# Altium PCB 7segments.PcbDoc
Units mm, origin at the board's own origin, x right, y up, seen from the top; angles counter-clockwise.
Board outline 40 x 42 mm, 2 copper layers (Top Layer, Bottom Layer); 10 components, 21 nets, 50 pads, 4 vias.
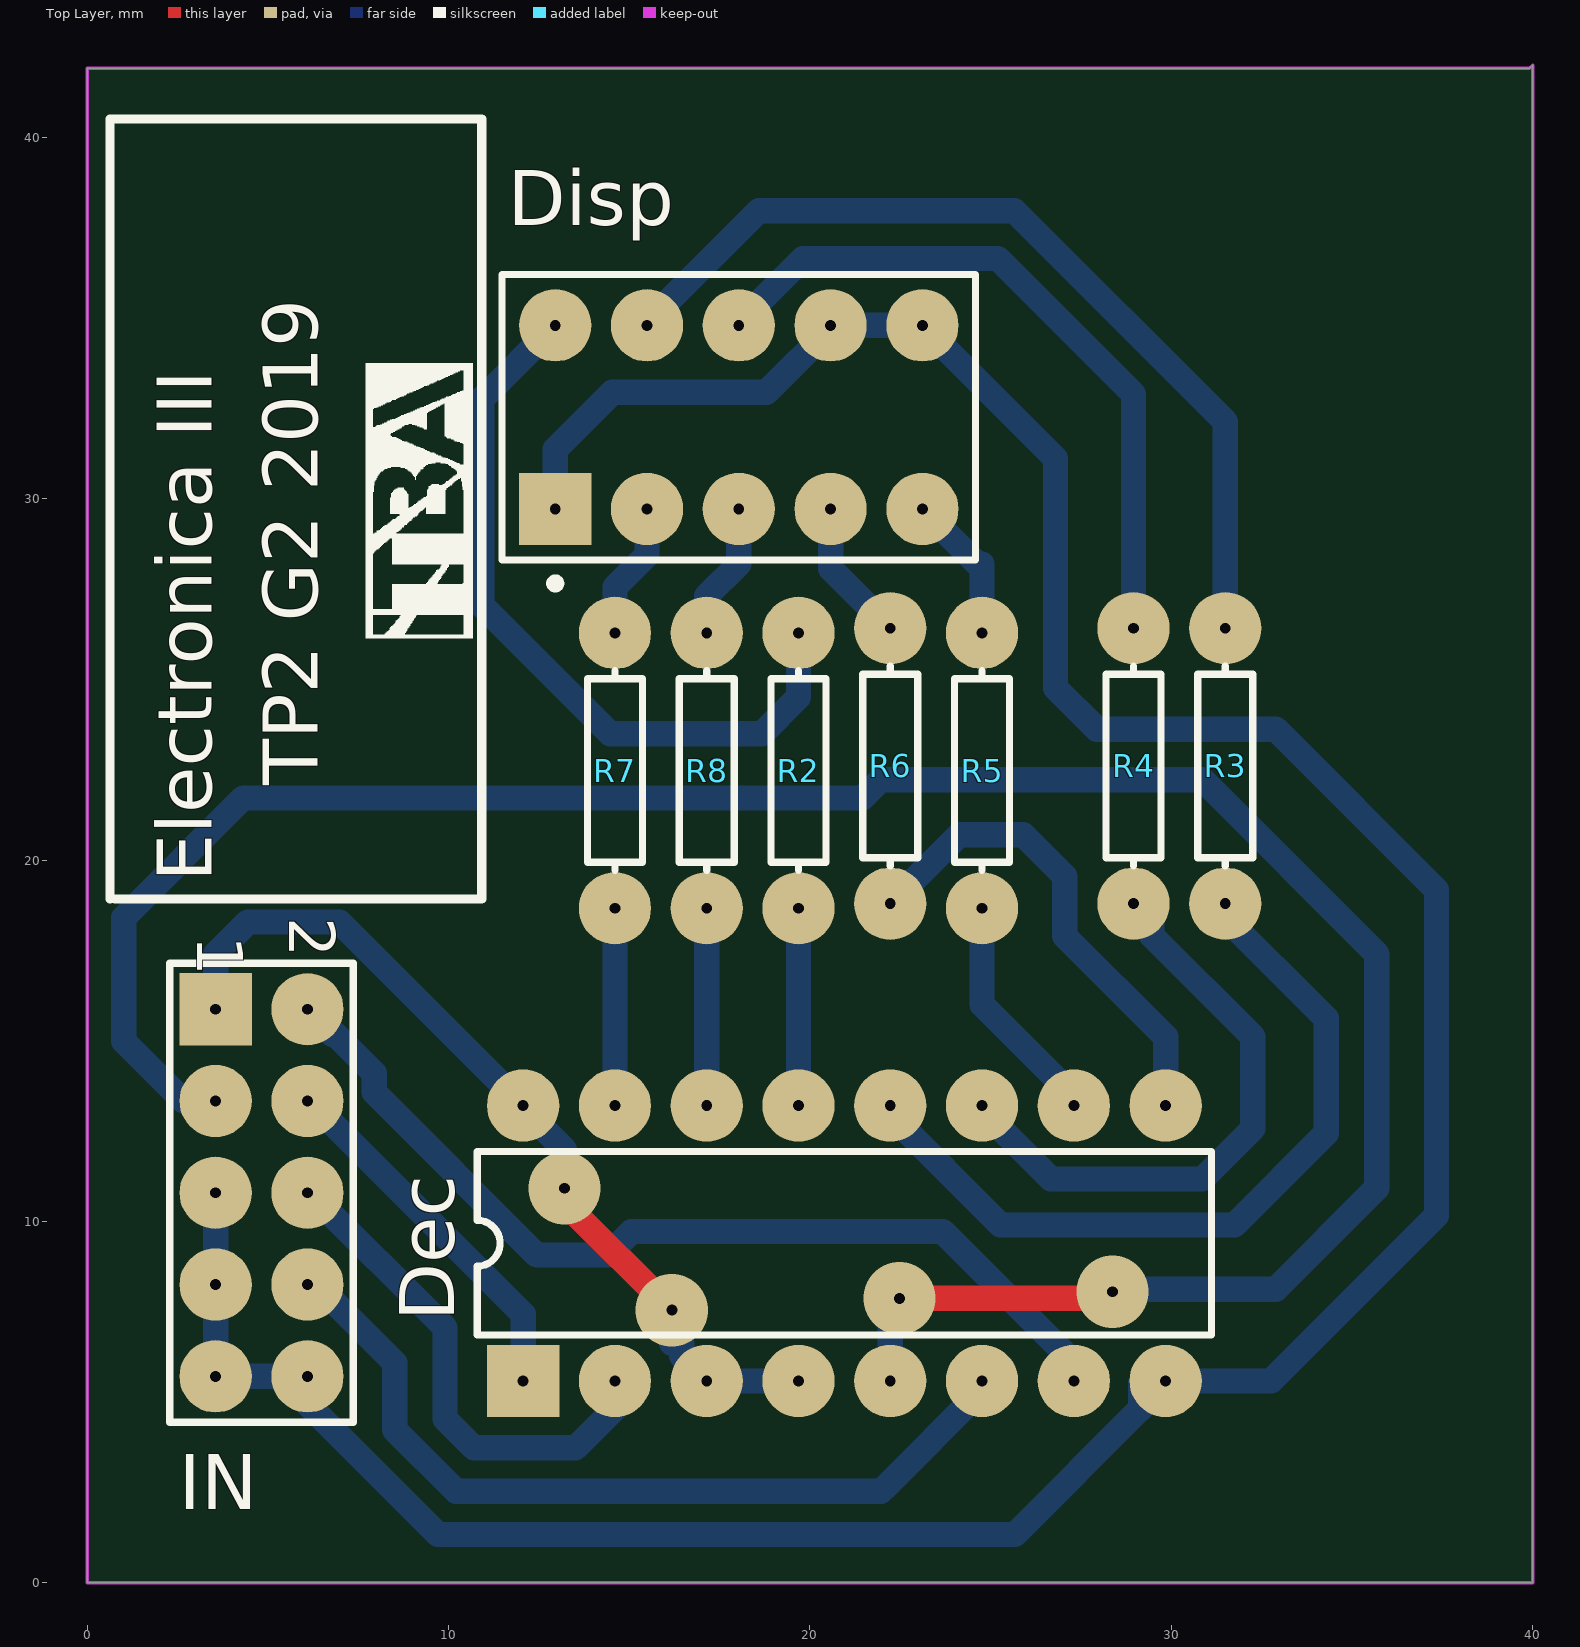
[diagram p0: Top Layer view]
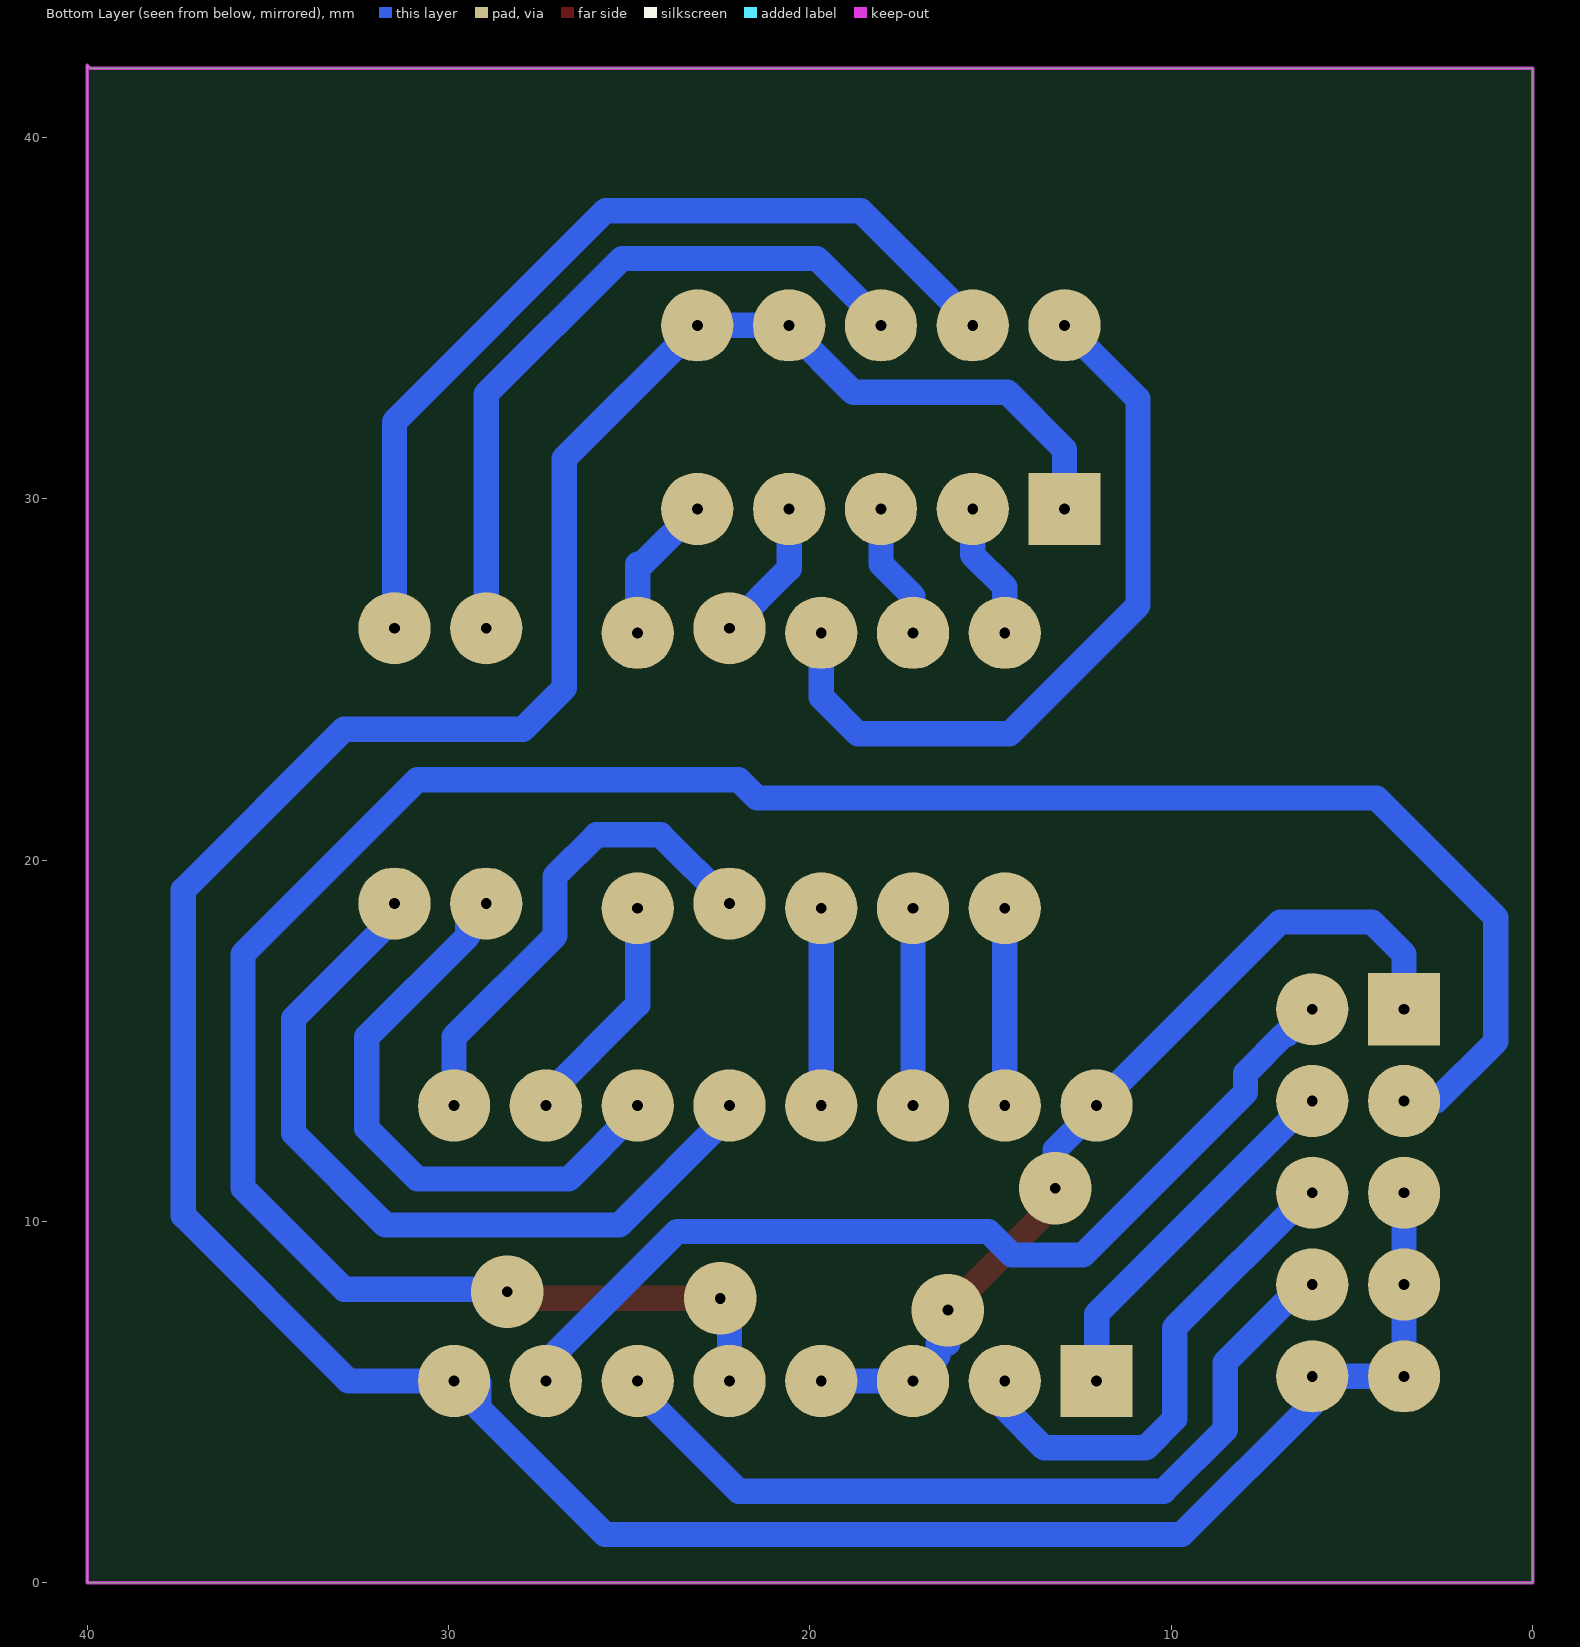
[diagram p1: Bottom Layer view, seen from below]

## Layer stack, top to bottom
Top Solder: solder mask 0.0102, Solder Resist, Dk 3.5
Top Layer: signal copper 0.0356
Dielectric 1: dielectric 0.32, FR-4, Dk 4.8
Bottom Layer: signal copper 0.0356
Bottom Solder: solder mask 0.0102, Solder Resist, Dk 3.5

## Board outline
0,0 0,41.91 39.91,41.91 40,42 40,0

## Design rules (kind name [scope] priority, off if disabled: settings)
Clearance [All] p1: gap=0.5
PolygonConnect [All] p1: connectstyle=Relief reliefconductorwidth=0.254 reliefentries=4 polygonreliefangle="90 Angle" airgapwidth=0.254
RoutingVias [All] p1: holewidth=0.3 width=2 viastyle="Through Hole" minholewidth=0.3 minwidth=2 maxholewidth=0.3 maxwidth=2
SolderMaskExpansion [All] p1: expansion=0.102
Width [All] p1: maxlimit=0.7 minlimit=0.7 preferedwidth=0.7
30 further rules are at their usual default settings.

## Components (designator, comment, footprint, x,y, rotation, side; value= is the part's Value field where it differs from the comment)
Dec "CD4511" DIP16 12.065,5.588 r90 top
Disp "Dpy Red-CC" A 18.034,32.258 r90 top
IN "Header 5X2" HDR2X5 3.556,15.875 r270 top
R2 "270" AXIAL-0.3 19.685,22.479 r90 top
R3 "270" AXIAL-0.3 31.496,22.606 r90 top
R4 "270" AXIAL-0.3 28.956,22.606 r90 top
R5 "270" AXIAL-0.3 24.765,22.479 r90 top
R6 "270" AXIAL-0.3 22.225,22.606 r90 top
R7 "270" AXIAL-0.3 14.605,22.479 r90 top
R8 "270" AXIAL-0.3 17.145,22.479 r90 top

## Footprints (in the part's own frame and the unit in brackets; to place one, negate y for a bottom-side part, rotate by r counter-clockwise, add the part's x,y. Pads: shape width x height; smd on the part's side, far side on the other; paste and mask are expansions set on the pad)
A [mm] "LED, 7-Segment Display, 7.62 mm, RHD; 10 Leads; Row Space 5.08 mm; Pitch 2.54 mm"
  rect 2x2 hole 0.3: 1(-2.54,5.08)
  round 2 hole 0.3: 2(-2.54,2.54) 3(-2.54,0) 4(-2.54,-2.54) 5(-2.54,-5.08) 6(2.54,-5.08) 7(2.54,-2.54) 8(2.54,0) 9(2.54,2.54) 10(2.54,5.08)
  silkscreen extent -4.72,-6.55 3.95,6.55, body extent -3.95,-6.55 3.95,6.55, height 6.34
AXIAL-0.3 [mm] "Axial Device, Thru-Hole; 2 Leads; 0.3 in Pin Spacing"
  round 2 hole 0.3: 1(-3.81,0) 2(3.81,0)
  silkscreen extent -2.77,-0.76 2.77,0.76
DIP16 [mm]
  rect 2x2 hole 0.3: 1(0,0)
  round 2 hole 0.3: 2(0,-2.54) 3(0,-5.08) 4(0,-7.62) 5(0,-10.16) 6(0,-12.7) 7(0,-15.24) 8(0,-17.78) 9(7.62,-17.78) 10(7.62,-15.24) 11(7.62,-12.7) 12(7.62,-10.16) 13(7.62,-7.62) 14(7.62,-5.08) 15(7.62,-2.54) 16(7.62,0)
  silkscreen extent 1.27,-19.05 6.35,1.27, body extent -0.08,-18.89 7.79,1.11, height 1.98
HDR2X5 [mm] "Connector; Header; 5x2 Position"
  rect 2x2 hole 0.3: 1(0,0)
  round 2 hole 0.3: 2(0,2.54) 3(2.54,0) 4(2.54,2.54) 5(5.08,0) 6(5.08,2.54) 7(7.62,0) 8(7.62,2.54) 9(10.16,0) 10(10.16,2.54)
  silkscreen extent -1.27,-1.27 11.43,3.81

## Part data
Dec: "BCD to 7 SEGMENTOS"
Disp: "7.62 mm Black Surface HER 7-Segment Display: CC, RH DP"
IN: "Header, 5-Pin, Dual row"
R2 R3 R4 R5 R6 R7 R8: library part Res1, "Resistor"

## Via types
v1: diameter 2, hole 0.3, Top Layer to Bottom Layer, 4 vias

## Nets (pads, with @x,y where several pads share a name; then routed paths per layer and width w, separated by ;. In a path a pad name is that pad's centre, name@x,y a point inside that pad or via, vN(x,y) a via of type N, cw(c..) or ccw(c..) an arc to the next point about the centre after c; other vN are vias at no path point)
CLK: Dec.5 IN.3 | length 67.6
  Top Layer w0.7: v1(22.479,7.874) v1@28.191,7.874
  Bottom Layer w0.7: IN.3 2.667,13.335 1.016,14.986 1.016,18.415 4.318,21.717 21.463,21.717 21.971,22.225 30.861,22.225 35.687,17.399 35.687,10.922 32.893,8.128 28.445,8.128 v1(28.373,8.056) ; Dec.5 v1@22.225,7.62
GND: Dec.8 Disp.1 Disp.6 Disp.7 IN.5 IN.7 IN.9 IN.10 | length 91.9
  Bottom Layer w0.7: IN.5 IN.7 IN.9 IN.10 6.096,4.953 9.711,1.338 25.671,1.338 29.155,4.822 29.155,5.533 29.21,5.588 Dec.8 32.766,5.588 37.338,10.16 37.338,19.177 32.893,23.622 27.94,23.622 26.797,24.765 26.797,31.115 Disp.6 20.65,34.798 18.8,32.948 14.533,32.948 12.954,31.369 Disp.1
NetDec_9: Dec.9 R6.1 | length 13.6
  Bottom Layer w0.7: R6.1 24.13,20.701 25.908,20.701 27.051,19.558 27.051,17.907 29.845,15.113 Dec.9
NetDec_10: Dec.10 R5.1 | length 6.5
  Bottom Layer w0.7: R5.1 24.765,16.002 27.305,13.462 Dec.10
NetDec_11: Dec.11 R4.1 | length 16.1
  Bottom Layer w0.7: Dec.11 24.765,13.081 26.67,11.176 30.861,11.176 32.258,12.573 32.258,15.113 29.464,17.907 R4.1@29.464,18.542
NetDec_12: Dec.12 R3.1 | length 21.9
  Bottom Layer w0.7: Dec.12 22.225,12.954 25.273,9.906 31.75,9.906 34.29,12.446 34.29,15.621 R3.1@31.369,18.542
NetDec_13: Dec.13 R2.1 | length 5.5
  Bottom Layer w0.7: Dec.13 R2.1
NetDec_14: Dec.14 R8.1 | length 5.2
  Bottom Layer w0.7: Dec.14 R8.1@17.145,18.415
NetDec_15: Dec.15 R7.1 | length 5.5
  Bottom Layer w0.7: Dec.15 R7.1
NetDisp_2: Disp.2 R7.2 | length 3.8
  Bottom Layer w0.7: R7.2 14.605,27.559 15.494,28.448 Disp.2
NetDisp_3: Disp.3 R8.2 | length 3.8
  Bottom Layer w0.7: R8.2 17.145,27.305 18.034,28.194 Disp.3
NetDisp_4: Disp.4 R6.2 | length 4
  Bottom Layer w0.7: Disp.4 20.574,28.067 R6.2
NetDisp_5: Disp.5 R5.2 | length 4.2
  Bottom Layer w0.7: Disp.5 24.638,28.194 24.765,28.194 R5.2
NetDisp_8: Disp.8 R4.2 | length 19.7
  Bottom Layer w0.7: Disp.8@18.034,34.874 19.808,36.648 25.201,36.648 28.956,32.893 R4.2
NetDisp_9: Disp.9 R3.2 | length 25.5
  Bottom Layer w0.7: Disp.9 15.494,34.874 18.593,37.973 25.654,37.973 31.496,32.131 R3.2
NetDisp_10: Disp.10 R2.2 | length 21
  Bottom Layer w0.7: Disp.10 10.922,32.766 10.922,27.051 14.478,23.495 18.669,23.495 19.685,24.511 R2.2
Q0: Dec.7 IN.2 | length 25.6
  Bottom Layer w0.7: IN.2@6.786,15.185 6.862,15.185 7.946,14.101 7.946,13.568 12.442,9.072 14.406,9.072 15.058,9.724 23.677,9.724 27.305,6.096 Dec.7
Q1: Dec.1 IN.4 | length 10.3
  Bottom Layer w0.7: IN.4 6.172,13.335 12.065,7.442 Dec.1
Q2: Dec.2 IN.6 | length 13.4
  Bottom Layer w0.7: IN.6 6.172,10.795 9.906,7.061 9.906,4.537 10.705,3.738 13.517,3.738 Dec.2@14.605,4.826
Q3: Dec.6 IN.8 | length 23.4
  Bottom Layer w0.7: IN.8 6.35,8.255 8.509,6.096 8.509,4.237 10.208,2.538 21.971,2.538 ; 22.034,2.603 24.765,5.334 Dec.6
VCC: Dec.3 Dec.4 Dec.16 IN.1 | length 26.4
  Top Layer w0.7: v1(13.208,10.922) 13.208,11.166 v1@13.061,11.314 ; v1(16.181,7.548) 13.335,10.394 13.335,10.414 13.061,10.688 v1@13.061,11.314 ; v1@13.061,11.314 13.061,11.527 12.954,11.42 v1@13.061,11.314
  Bottom Layer w0.7: IN.1 3.556,17.399 4.445,18.288 6.985,18.288 Dec.16 12.065,13.132 13.208,11.989 v1(13.208,10.922) ; v1(16.181,7.548) 16.181,6.629 16.455,6.629 16.455,6.278 Dec.3 Dec.4

## Keep-outs
Keep-Out Layer:
  lines w0.1: 0,0 40,0 40,42 39.91,41.91 0,41.91 0,0 ; 0,0 0,0

## Silkscreen, mask and mechanical layers (free items; w line width, h text height)
Top Overlay:
  drawing of 676 lines, arcs and shapes, not listed
  text "TP2 G2 2019" at 6.375,22.073 h1.52 r90
  text "Electronica III" at 3.454,19.406 h1.52 r90

## Text inside footprints (layer, text, board x,y; h text height)
IN: Top Overlay "10" at -23.368,25.273 h1.27; Top Overlay "9" at -37.338,24.511 h1.27; Top Overlay "1" at 3.048,17.907 h1.27 r270; Top Overlay "2" at 5.588,18.415 h1.27 r270